# Altium PCB AT89S52多功能板.PcbDoc (part 1 of 5)
Units mm, origin at the board's own origin, x right, y up, seen from the top; angles counter-clockwise.
Board outline 152.4 x 101.6 mm, 2 copper layers (Top Layer, Bottom Layer); 140 components, 143 nets, 570 pads, 50 vias.
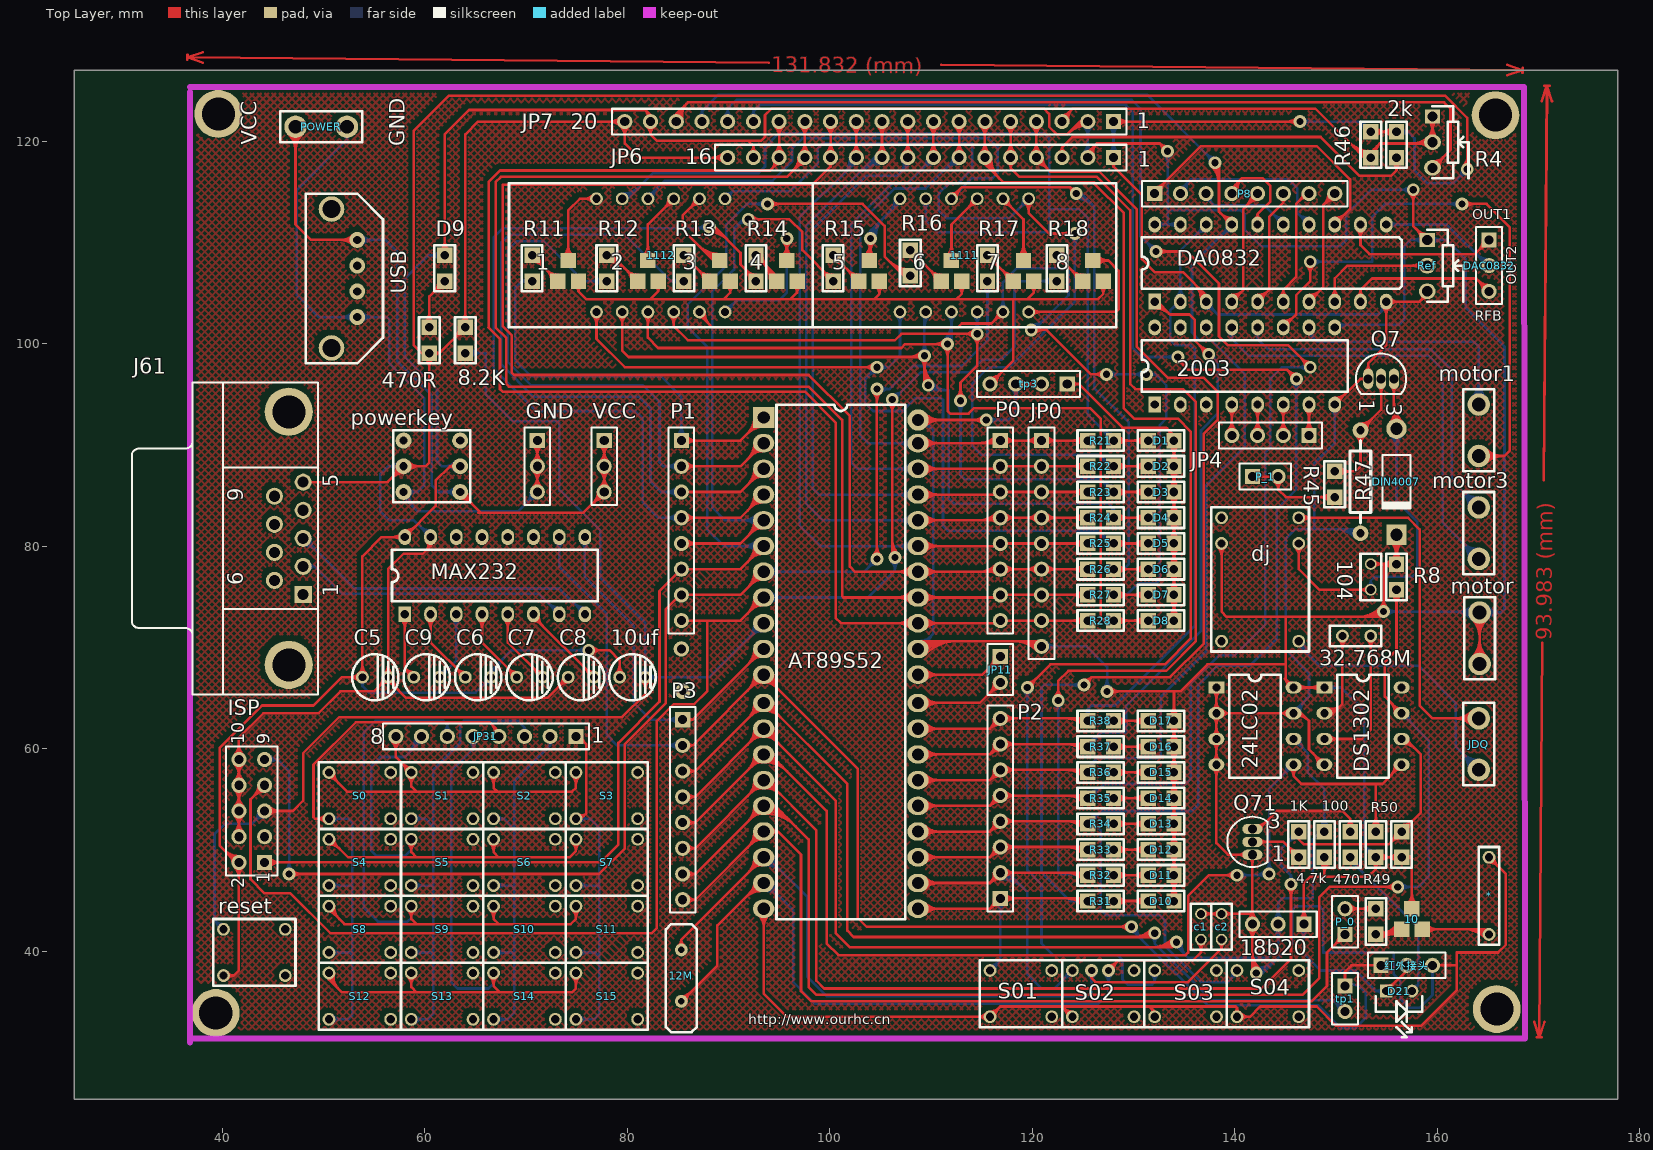
[diagram p0: Top Layer view]
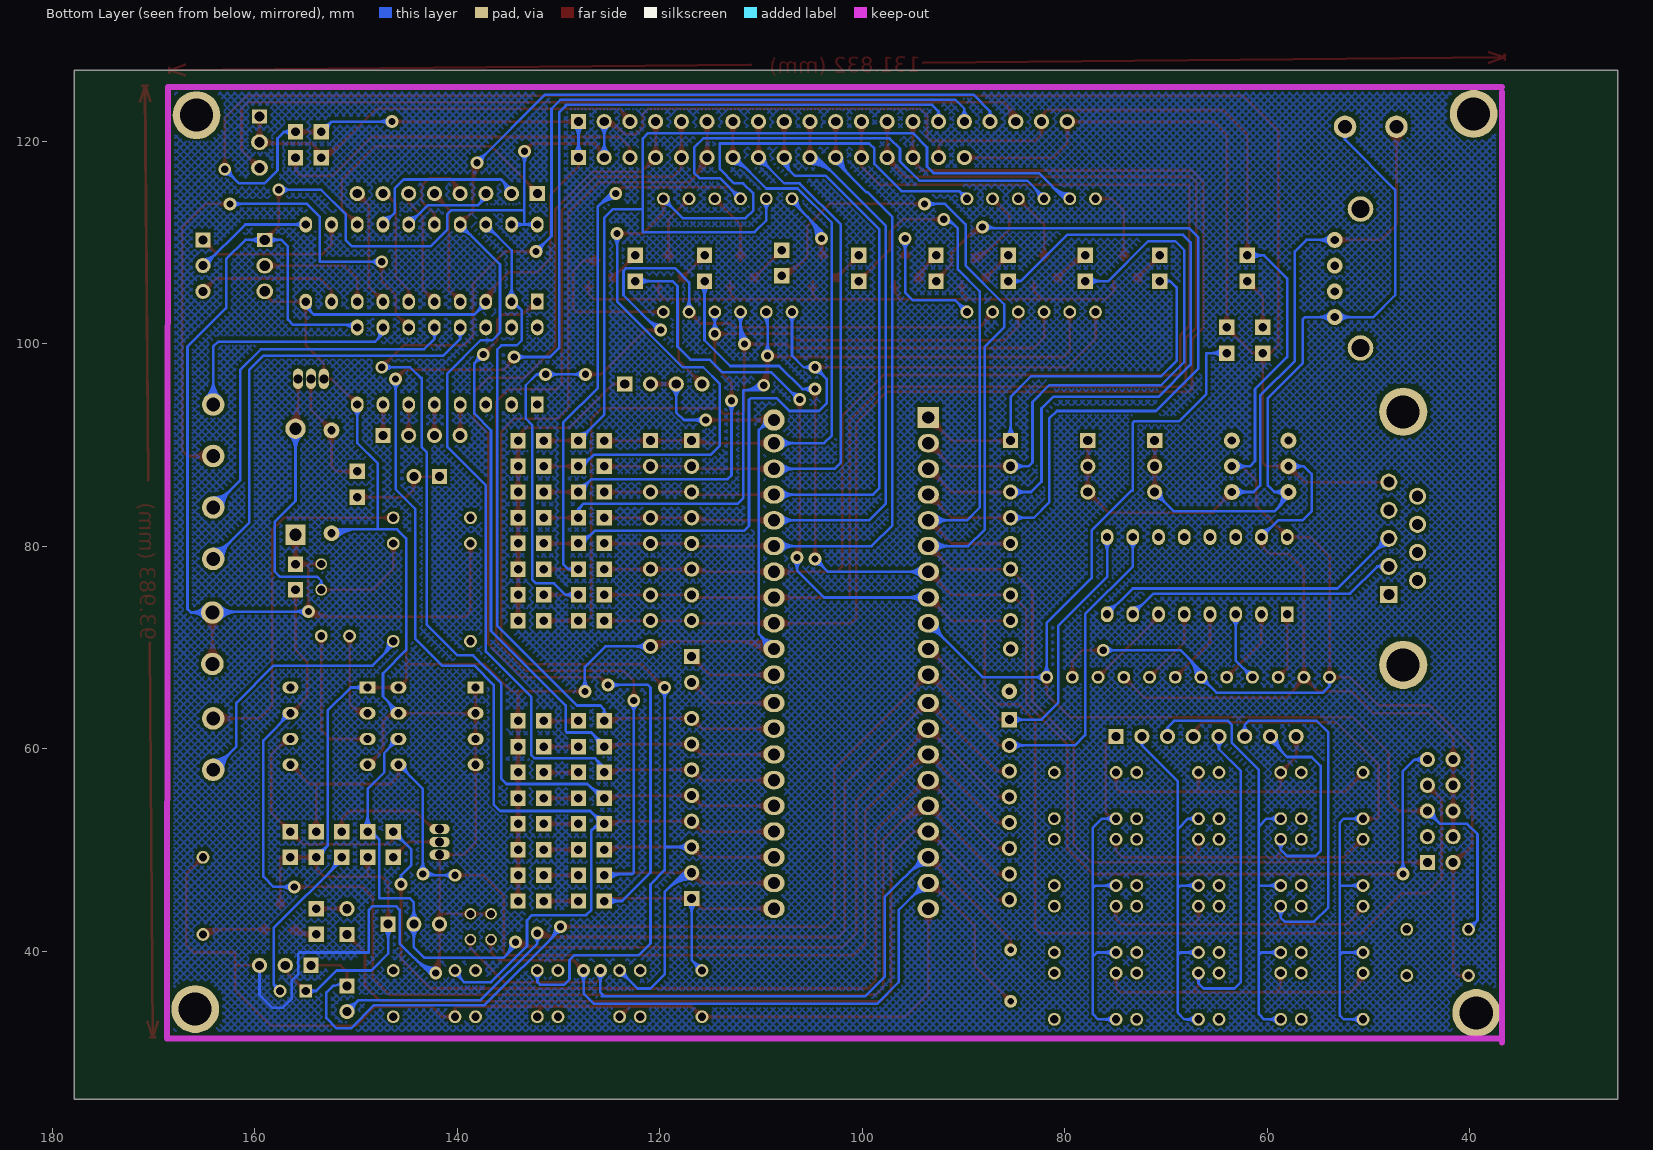
[diagram p1: Bottom Layer view, seen from below]

## Layer stack, top to bottom
Top Layer: signal copper 0.0356
Dielectric: dielectric 0.32, FR-4, Dk 4.8
Bottom Layer: signal copper 0.0356

## Board outline
25.4,25.4 177.8,25.4 177.8,127 25.4,127

## Design rules (kind name [scope] priority, off if disabled: settings)
Clearance [All] p1: gap=0.254
ComponentClearance [All] p1: gap=0.254 collisioncheckmode=0 verticalgap=0.254
PolygonConnect [All] p1: connectstyle=Relief reliefconductorwidth=0.254 reliefentries=4 polygonreliefangle="90 Angle"
RoutingVias [All] p1: holewidth=0.711 width=1.27 viastyle="Through Hole" minholewidth=0.711 minwidth=1.27 maxholewidth=0.711 maxwidth=1.27
SolderMaskExpansion [All] p1: expansion=0.102
TestPointUsage [All] p1: valid=0 allowmultiple=FALSE
Testpoint [All] p1: side=15 testpointundercomponent=TRUE minsize=1.016 maxsize=2.54 preferedsize=1.524 minholesize=0 maxholesize=1.016 preferedholesize=0.813 testpointgrid=0.025 style=1023 order=0123456789
Width [All] p1: maxlimit=0.254 minlimit=0.254 preferedwidth=0.254
17 further rules are at their usual default settings.

## Components (designator, comment, footprint, x,y, rotation, side; value= is the part's Value field where it differs from the comment)
1 "NPN1" NPN1PF 72.136,109.22 r0 top
1K "RES34" RES1PF 146.304,51.816 r270 top
2 "2" NPN1PF 80.01,109.22 r0 top
2k "R5" RES1PF 155.956,120.904 r270 top
3 "3" NPN1PF 87.122,109.22 r0 top
4 "NPN1" NPN1PF 93.726,109.22 r0 top
4.7k "RES1" RES1PF 148.844,49.276 r90 top
5 "NPN1" NPN1PF 101.854,109.22 r0 top
6 "NPN1" NPN1PF 109.982,109.22 r0 top
7 "NPN1" NPN1PF 117.094,109.22 r0 top
8 "NPN1" NPN1PF 123.952,109.22 r0 top
8.2K "RES1" RES1PF 64.008,99.06 r90 top
10 "NPN1" NPN1PF 155.448,45.212 r0 top
10uf "10uf" cap2 74.676,67.056 r0 top
12M "12M" CRYSTAL 84.328,37.592 r90 top
18b20 "CON3" HDR1X3 146.812,42.672 r180 top
24LC02 "24LC02" DIP8 138.176,66.04 r0 top
32.768M "CY" CYPF 155.448,68.58 r180 top (schematic designator 121)
100 "RES2" RES1PF 151.384,49.276 r90 top
104 "0.01UF" RAD0.3 153.416,78.74 r270 top
470 "R2" RES1PF 153.924,41.656 r90 top
470R "R1" RES1PF 60.452,101.6 r270 top
1111 "LED8" LED8PF 98.298,115.824 r0 top
1112 "LED8" LED8PF 68.326,115.824 r0 top
2003 "2003" 2003PF 130.556,94.996 r90 top
* "LS1" LS1PF 165.1,41.656 r90 top
AT89S52 "AT89S52" AT89S52PF 92.456,69.088 r0 top
c1 "C" RAD0.3 136.652,44.196 r270 top
c2 "15p" RAD0.3 138.684,44.196 r270 top
C5 "1uf" cap2 49.276,67.056 r0 top
C6 "1uf" cap2 59.436,67.056 r0 top
C7 "1uf" cap2 64.516,67.056 r0 top
C8 "1uf" cap2 69.596,67.056 r0 top
C9 "1uf" cap2 54.356,67.056 r0 top
D1 "LED" RES1PF 133.985,90.424 r180 top
D2 "LED" RES1PF 133.985,87.884 r180 top
D3 "LED" RES1PF 133.985,85.344 r180 top
D4 "LED" RES1PF 133.985,82.804 r180 top
D5 "LED" RES1PF 133.985,80.264 r180 top
D6 "LED" RES1PF 133.985,77.724 r180 top
D7 "LED" RES1PF 133.985,75.184 r180 top
D8 "LED" RES1PF 133.985,72.644 r180 top
D9 "LED" RES1PF 61.976,108.712 r270 top
D10 "LED" RES1PF 133.985,44.958 r180 top
D11 "LED" RES1PF 133.985,47.498 r180 top
D12 "LED" RES1PF 133.985,50.038 r180 top
D13 "LED" RES1PF 133.985,52.578 r180 top
D14 "LED" RES1PF 133.985,55.118 r180 top
D15 "LED" RES1PF 133.985,57.658 r180 top
D16 "LED" RES1PF 133.985,60.198 r180 top
D17 "LED" RES1PF 133.985,62.738 r180 top
D21 "LED" LED 156.972,35.56 r180 top
DA0832 "DA0832" DAC0832PF 130.556,105.156 r90 top
DAC0832 "CON3" HDR1X3 165.1,110.236 r270 top
DIN4007 "Diode 1N4007" DO-41 155.956,86.36 r270 top
dj "JDQ" JDQPF 138.684,82.804 r0 top
DS1302 "DS1302" DIP8 148.844,66.04 r0 top
GND "公共电源" HDR1X3 71.12,90.424 r270 top
ISP "download" HDR2X5 44.196,48.768 r90 top
J61 "D Connector 9" DSUB1.385-2H9 37.084,80.772 r90 top
JDQ "POWER" POWERPF 164.084,62.992 r270 top
JP0 "Header 9" HDR1X9 120.904,90.424 r270 top
JP4 "Header 4" HDR1X4 147.32,90.932 r180 top
JP6 "Header 16" HDR1X16 128.016,118.364 r180 top
JP7 "" HDR1X20 128.016,121.92 r180 top
JP11 "Header 2" HDR1X2 116.84,69.088 r270 top
JP31 "Header 8" HDR1X8 74.93,61.214 r180 top
MAX232 "MAX232" DIP16 58.039,73.279 r90 top
motor "POWER" POWERPF 164.162,68.366 r90 top
motor1 "POWER" POWERPF 164.084,88.9 r90 top
motor3 "POWER" POWERPF 164.084,78.74 r90 top
P0 "Header 8" HDR1X8 116.84,90.424 r270 top
P1 "Header 8" HDR1X8 85.344,90.424 r270 top locked
P2 "Header 8" HDR1X8 116.84,45.212 r90 top
P3 "Header 8" HDR1X8 85.471,62.865 r270 top
P8 "Header 8" HDR1X8 132.08,114.808 r0 top
P_0 "Header 2" HDR1X2 150.876,41.656 r90 top
P_1 "Header 2" HDR1X2 141.732,86.868 r0 top
POWER "POWER" POWERPF 47.244,121.412 r0 top
powerkey "POWERKEY" POWERKEY1 63.5,85.344 r180 top
Q7 "2N3904" TO-92A 154.432,96.52 r270 top
Q71 "2N3904" TO-92A 141.732,50.8 r0 top
R4 "25k" SIP3-D 159.512,122.428 r270 top
R8 "1K" RES1PF 155.956,75.692 r90 top
R11 "RES1" RES1PF 70.612,106.172 r90 top
R12 "RES1" RES1PF 77.978,106.172 r90 top
R13 "RES1" RES1PF 85.598,106.172 r90 top
R14 "RES1" RES1PF 92.71,106.172 r90 top
R15 "RES1" RES1PF 100.33,106.172 r90 top
R16 "RES1" RES1PF 107.95,106.68 r90 top
R17 "RES1" RES1PF 115.57,106.172 r90 top
R18 "RES1" RES1PF 122.428,106.172 r90 top
R21 "RES1" RES1PF 125.476,90.424 r0 top
R22 "RES1" RES1PF 125.476,87.884 r0 top
R23 "RES1" RES1PF 125.476,85.344 r0 top
R24 "RES1" RES1PF 125.476,82.804 r0 top
R25 "RES1" RES1PF 125.476,80.264 r0 top
R26 "RES1" RES1PF 125.476,77.724 r0 top
R27 "RES1" RES1PF 125.476,75.184 r0 top
R28 "RES1" RES1PF 125.476,72.644 r0 top
R31 "RES1" RES1PF 125.476,44.958 r0 top
R32 "RES1" RES1PF 125.476,47.498 r0 top
R33 "RES1" RES1PF 125.476,50.038 r0 top
R34 "RES1" RES1PF 125.476,52.578 r0 top
R35 "RES1" RES1PF 125.476,55.118 r0 top
R36 "RES1" RES1PF 125.476,57.658 r0 top
R37 "RES1" RES1PF 125.476,60.198 r0 top
R38 "RES1" RES1PF 125.476,62.738 r0 top
R45 "1K" RES1PF 149.86,87.376 r270 top
R46 "RES1" RES1PF 153.416,120.904 r270 top
R47 "220k" AXIAL0.4 152.4,81.28 r90 top
R49 "1K" RES1PF 156.464,51.816 r270 top
R50 "1K" RES1PF 153.924,51.816 r270 top
Ref "25k" SIP3-D 159.004,110.236 r270 top
reset "KEY" keypf 40.132,42.164 r0 top
S0 "KEY" KEYPF 50.546,57.658 r0 top
S01 "KEY" KEYPF 115.824,38.1 r0 top
S1 "KEY" KEYPF 58.674,57.658 r0 top
S02 "KEY" KEYPF 123.952,38.1 r0 top
S2 "KEY" KEYPF 66.802,57.658 r0 top
S03 "KEY" KEYPF 132.08,38.1 r0 top
S3 "KEY" KEYPF 74.93,57.658 r0 top
S04 "KEY" KEYPF 140.208,38.1 r0 top
S4 "KEY" KEYPF 50.546,51.054 r0 top
S5 "KEY" KEYPF 58.674,51.054 r0 top
S6 "KEY" KEYPF 66.802,51.054 r0 top
S7 "KEY" KEYPF 74.93,51.054 r0 top
S8 "KEY" KEYPF 50.546,44.45 r0 top
S9 "KEY" KEYPF 58.674,44.45 r0 top
S10 "KEY" KEYPF 66.802,44.45 r0 top
S11 "KEY" KEYPF 74.93,44.45 r0 top
S12 "KEY" KEYPF 50.546,37.846 r0 top
S13 "KEY" KEYPF 58.674,37.846 r0 top
S14 "KEY" KEYPF 66.802,37.846 r0 top
S15 "KEY" KEYPF 74.93,37.846 r0 top
tp1 "Header 2" HDR1X2 150.876,36.576 r270 top
tp3 "Header 4" HDR1X4 123.444,96.012 r180 top
USB "USBPOWER" USBPOWER1 53.34,102.616 r90 top (schematic designator 211)
VCC "" HDR1X3 77.724,90.424 r270 top
红外接头 "Header 3" HDR1X3 154.432,38.608 r0 top

## Footprints (in the part's own frame and the unit in brackets; to place one, negate y for a bottom-side part, rotate by r counter-clockwise, add the part's x,y. Pads: shape width x height; smd on the part's side, far side on the other; paste and mask are expansions set on the pad)
2003PF [mm] "2003"
  rect 1.575x1.25 hole 0.813: 1(-1.02,-1.525)
  oval 1.575x1.25 hole 0.813: 2(-1.02,-4.065) 3(-1.02,-6.605) 4(-1.02,-9.145) 5(-1.02,-11.685) 6(-1.02,-14.225) 7(-1.02,-16.765) 8(-1.02,-19.305) 9(6.6,-19.305) 10(6.6,-16.765) 11(6.6,-14.225) 12(6.6,-11.685) 13(6.6,-9.145) 14(6.6,-6.605) 15(6.6,-4.065) 16(6.6,-1.525)
  silkscreen extent 0.25,-20.58 5.33,-0.25
AT89S52PF [mil]
  rect 82.87x82.87 hole 47.75: 1(39.85,929.96)
  oval 82.87x71.06 hole 47.75: 2(39.85,829.96) 3(39.85,729.96) 4(39.85,629.96) 5(39.85,529.96) 6(39.85,429.96) 7(39.85,329.96) 8(39.85,229.96) 9(39.85,129.96) 10(39.85,29.96) 11(39.85,-70.04) 12(40,-180) 13(40,-280) 14(40,-380) 15(40,-480) 16(40,-580) 17(40,-680) 18(40,-780) 19(40,-880) 20(40,-980) 21(640,-980) 22(640,-880) 23(640,-780) 24(640,-680) 25(640,-580) 26(640,-480) 27(640,-380) 28(640,-280) 29(640,-180) 30(639.85,-70.04) 31(639.85,29.96) 32(639.85,129.96) 33(639.85,229.96) 34(639.85,329.96) 35(639.85,429.96) 36(639.85,529.96) 37(639.85,629.96) 38(639.85,729.96) 39(639.85,829.96)
  round 82.87 hole 47.75: 40(640,920)
  silkscreen extent 90,-1020 590,980
AXIAL0.4 [mil]
  round 62 hole 32: 1(-0.15,-0.04) 2(399.85,-0.04)
  silkscreen extent 40,-40 360,40
cap2 [mil]
  round 50 hole 30: 1(180,0) 2(280,0)
  silkscreen extent 140,-90 320,90
CRYSTAL [mil]
  round 50 hole 25: 1(-100,-40) 2(100,-40)
  silkscreen extent -220,-100 200,20
CYPF [mil] "CY"
  round 50 hole 30: 1(80,-100) 2(190,-100)
  silkscreen extent 40,-140 240,-60
DAC0832PF [mil] "DAC0832"
  rect 62x49.21 hole 32: 1(-40.15,-60.04)
  oval 62x49.21 hole 32: 2(-40.15,-160.04) 3(-40.15,-260.04) 4(-40.15,-360.04) 5(-40.15,-460.04) 6(-40.15,-560.04) 7(-40.15,-660.04) 8(-40.15,-760.04) 9(-40,-860) 10(-40.15,-960.04) 11(259.85,-960.04) 12(259.85,-860.04) 13(259.85,-760.04) 14(259.85,-660.04) 15(259.85,-560.04) 16(259.85,-460.04) 17(259.85,-360.04) 18(259.85,-260.04) 19(259.85,-160.04) 20(259.85,-60.04)
  silkscreen extent 10,-1020 210,-10
DIP8 [mil]
  rect 62x48 hole 32: 1(-0.15,-0.04)
  oval 62x48 hole 32: 2(-0.15,-100.04) 3(-0.15,-200.04) 4(-0.15,-300.04) 5(299.85,-300.04) 6(299.85,-200.04) 7(299.85,-100.04) 8(299.85,-0.04)
  silkscreen extent 50,-350 250,50
DIP16 [mil]
  rect 62x49.21 hole 32: 1(-0.15,-0.04)
  oval 62x49.21 hole 32: 2(-0.15,-100.04) 3(-0.15,-200.04) 4(-0.15,-300.04) 5(-0.15,-400.04) 6(-0.15,-500.04) 7(-0.15,-600.04) 8(-0.15,-700.04) 9(299.85,-700.04) 10(299.85,-600.04) 11(299.85,-500.04) 12(299.85,-400.04) 13(299.85,-300.04) 14(299.85,-200.04) 15(299.85,-100.04) 16(299.85,-0.04)
  silkscreen extent 50,-750 250,50
DO-41 [mm] "Diode, Axial; Body 5.2 x 2.7 mm (LxDia. max), Lead Dia. 0.86 mm (max)"
  round 2 hole 1.2: 1(-5.23,0)
  rect 2x2 hole 1.2: 2(5.23,0)
  silkscreen extent -2.65,-1.4 2.74,1.4
DSUB1.385-2H9 [mm] "Connector; D Subminiature; 9 Position; Right Angle; Pitch 1.385 mm"
  rect 1.69x1.69 hole 1.09: 1(-5.54,-10.92)
  round 1.69 hole 1.09: 2(-2.77,-10.92) 3(0,-10.92) 4(2.77,-10.92) 5(5.54,-10.92) 6(-4.155,-8.08) 7(-1.385,-8.08) 8(1.385,-8.08) 9(4.155,-8.08)
  round 4.76 hole 3.26: 10(-12.495,-9.5) 11(12.495,-9.5)
  silkscreen extent -15.4,-12.4 15.4,6
HDR1X2 [mm] "Connector; Header; 2 Position"
  rect 1.5x1.5 hole 0.9: 1(0,0)
  round 1.5 hole 0.9: 2(2.54,0)
  silkscreen extent -1.27,-1.27 3.81,1.27
HDR1X3 [mm] "Connector; Header; 3 Position"
  rect 1.5x1.5 hole 0.9: 1(0,0)
  round 1.5 hole 0.9: 2(2.54,0) 3(5.08,0)
  silkscreen extent -1.27,-1.27 6.35,1.27
HDR1X4 [mm] "Connector; Header; 4 Position"
  rect 1.5x1.5 hole 0.9: 1(0,0)
  round 1.5 hole 0.9: 2(2.54,0) 3(5.08,0) 4(7.62,0)
  silkscreen extent -1.27,-1.27 8.89,1.27
HDR1X8 [mm] "Connector; Header; 8 Position"
  rect 1.5x1.5 hole 0.9: 1(0,0)
  round 1.5 hole 0.9: 2(2.54,0) 3(5.08,0) 4(7.62,0) 5(10.16,0) 6(12.7,0) 7(15.24,0) 8(17.78,0)
  silkscreen extent -1.27,-1.27 19.05,1.27
HDR1X9 [mm] "Connector; Header; 9 Position"
  rect 1.5x1.5 hole 0.9: 1(0,0)
  round 1.5 hole 0.9: 2(2.54,0) 3(5.08,0) 4(7.62,0) 5(10.16,0) 6(12.7,0) 7(15.24,0) 8(17.78,0) 9(20.32,0)
  silkscreen extent -1.27,-1.27 21.59,1.27
HDR1X16 [mm] "Connector; Header; 16 Position"
  rect 1.5x1.5 hole 0.9: 1(0,0)
  round 1.5 hole 0.9: 2(2.54,0) 3(5.08,0) 4(7.62,0) 5(10.16,0) 6(12.7,0) 7(15.24,0) 8(17.78,0) 9(20.32,0) 10(22.86,0) 11(25.4,0) 12(27.94,0) 13(30.48,0) 14(33.02,0) 15(35.56,0) 16(38.1,0)
  silkscreen extent -1.27,-1.27 39.37,1.27
HDR1X20 [mm] "Connector; Header; 20 Position"
  rect 1.5x1.5 hole 0.9: 1(0,0)
  round 1.5 hole 0.9: 2(2.54,0) 3(5.08,0) 4(7.62,0) 5(10.16,0) 6(12.7,0) 7(15.24,0) 8(17.78,0) 9(20.32,0) 10(22.86,0) 11(25.4,0) 12(27.94,0) 13(30.48,0) 14(33.02,0) 15(35.56,0) 16(38.1,0) 17(40.64,0) 18(43.18,0) 19(45.72,0) 20(48.26,0)
  silkscreen extent -1.27,-1.27 49.53,1.27
HDR2X5 [mm] "Connector; Header; 5x2 Position"
  rect 1.5x1.5 hole 0.9: 1(0,0)
  round 1.5 hole 0.9: 2(0,2.54) 3(2.54,0) 4(2.54,2.54) 5(5.08,0) 6(5.08,2.54) 7(7.62,0) 8(7.62,2.54) 9(10.16,0) 10(10.16,2.54)
  silkscreen extent -1.27,-1.27 11.43,3.81
JDQPF [mil] "JDQ"
  round 50 hole 32: 1(0,0) 2(300,0) 3(0,-480) 4(300,-480) 5(0,-100) 6(300,-100)
  silkscreen extent -40,-520 340,40
keypf [mil] "KEY"
  round 50 hole 32: 1(0,0) 2(0,-180) ""(240,-180) ""(240,0)
  silkscreen extent -40,-220 280,40
KEYPF [mil] "KEY"
  round 50 hole 32: 1(0,0) 2(0,-180) ""(240,-180) ""(240,0)
  silkscreen extent -40,-220 280,40
LED [mil]
  rect 50x50 hole 32: 1(80,-20)
  round 50 hole 32: 2(-20,-20)
  silkscreen extent -60,0 120,160
LED8PF [mil] "LED8"
  round 50 hole 32: 1(340,-500) 2(440,-500) 3(540,-500) 4(640,-500) 5(740,-500) 6(840,-500) 7(840,-60) 8(740,-60) 9(640,-60) 10(540,-60) 11(440,-60) 12(340,-60)
  silkscreen extent 0,-560 1180,0
LS1PF [mil] "LS1"
  round 50 hole 32: 1(0,0) 2(300,0)
  silkscreen extent -40,-40 340,40
NPN1PF [mil] "NPN1"
  rect 60x60 smd: B(40,-120) C(80,-40) E(120,-120)
POWERKEY1 [mil] "POWERKEY"
  round 62 hole 32: 1(0,0) 2(0,-100) 3(0,-200) 4(220,-200) 5(220,-100) 6(220,0)
  silkscreen extent -40,-240 260,40
POWERPF [mm] "POWER"
  round 2.224 hole 1.362: 1(0,0) 2(5.08,0)
  silkscreen extent -1.52,-1.52 6.6,1.52
RAD0.3 [mil]
  round 45 hole 32: 1(20,0) 2(120,0)
  silkscreen extent -20,-40 160,40
RES1PF [mil] "RES1"
  rect 60x60 hole 33.19: 1(0,0) 2(100,0)
  silkscreen extent -40,-40 140,40
SIP3-D [mil]
  rect 55x60 hole 40: 1(0,0)
  oval 60x65 hole 40: 2(200,0) 3(100,0)
  silkscreen extent -40,0 240,140
TO-92A [mm] "TO, Flat Index; 3 In-Line, Axial Leads; Body Dia. 4.5mm; Leads 0.51 x 0.48 mm (max)"
  oval 2x1 hole 0.9: 1(0,-1.27) 2(0,0) 3(0,1.27)
  silkscreen extent -2.48,-2.48 1.5,2.48
USBPOWER1 [mil] "USBPOWER"
  round 62 hole 32: 1(0,0) 2(100,0) 3(200,0) 4(300,0)
  round 99.37 hole 69.37: ""(-120,100) ""(420,100)
  silkscreen extent -180,-100 480,200

## Part data
1K 2k 100 470 470R R8 R45 R49 R50: library part RES1
2 3: library part NPN1
10uf C5 C6 C7 C8 C9: library part "CAPACITOR POL", "Capacitor"
12M: library part CRYSTAL, "Crystal"
18b20 GND VCC: library part "Header 3", "Header, 3-Pin"
104 c1 c2: library part CAP, "Capacitor"
AT89S52: library part 8051
DAC0832: "Connector"
DIN4007: "1 Amp General Purpose Rectifier"
ISP: library part "Header 5X2", "Header, 5-Pin, Dual row"
J61: "Receptacle Assembly, 9 Position, Right Angle"
JP0: "Header, 9-Pin"
JP4 tp3: "Header, 4-Pin"
JP6: "Header, 16-Pin"
JP7: library part "Header 20", "Header, 20-Pin"
JP11 P_0 P_1 tp1: "Header, 2-Pin"
JP31 P0 P1 P2 P3 P8: "Header, 8-Pin"
Q7 Q71: "NPN General Purpose Amplifier"
R4 Ref: library part POT2, "Potentiometer"
R47: library part RES2
红外接头: "Header, 3-Pin"

## Free pads (board coordinates)
  round 1.524 hole 0.9: 0(85.344,69.85)
  round 1.524 hole 0.762: 1(85.471,65.659)
  round 4.72 hole 3.267: 2(39.37,33.909) 2(39.624,122.682) 2(165.735,122.555) 2(165.862,34.29)

## Via types
v1: diameter 1.27, hole 0.711, Top Layer to Bottom Layer, 50 vias

## Nets (pads, with @x,y where several pads share a name; then routed paths per layer and width w, separated by ;. In a path a pad name is that pad's centre, name@x,y a point inside that pad or via, vN(x,y) a via of type N, cw(c..) or ccw(c..) an arc to the next point about the centre after c; other vN are vias at no path point)
DISPLAY: 1.E 2.E 3.E 4.E 5.E 6.E 7.E 8.E tp3.4 | length 94
  Top Layer w0.254: 1.E@75.184,106.172 75.184,105.156 ; 82.296,104.394 83.058,105.156 ; 2.E@83.058,106.172 83.058,105.156 ; 89.535,104.394 90.17,105.029 ; 3.E@89.835,105.633 cw(c89.459,105.029) 90.17,105.029 ; 3.E@90.17,106.172 90.17,105.029 ; 3.E@90.505,105.633 ccw(c90.881,105.029) 90.17,105.029 ; 96.139,104.394 96.774,105.029 ; 4.E@96.439,105.633 cw(c96.063,105.029) 96.774,105.029 ; 4.E@96.774,106.172 96.774,105.029 ; 4.E@97.109,105.633 ccw(c97.485,105.029) 96.774,105.029 ; 104.394,104.394 104.902,104.902 ; 5.E@104.521,105.664 cw(c103.95,104.902) 104.902,104.902 ; 5.E@104.902,106.172 104.902,104.902 ; 5.E@105.283,105.664 ccw(c105.854,104.902) 104.902,104.902 ; 112.522,104.394 113.03,104.902 ; 6.E@112.649,105.664 cw(c112.078,104.902) 113.03,104.902 ; 6.E@113.03,106.172 113.03,104.902 ; 6.E@113.411,105.664 ccw(c113.982,104.902) 113.03,104.902 ; tp3.4@115.824,96.012 118.11,98.298 118.11,104.394 ; tp3.4@115.824,96.381 ccw(c115.824,97.272) 116.454,96.642 ccw(c117.084,96.012) tp3.4@116.193,96.012 ; tp3.4@115.824,96.635 ccw(c115.824,98.139) 116.888,97.076 ccw(c117.951,96.012) tp3.4@116.447,96.012 ; 119.507,104.394 120.142,105.029 ; 7.E@119.807,105.633 cw(c119.431,105.029) 120.142,105.029 ; 7.E@120.142,106.172 120.142,105.029 ; 7.E@120.477,105.633 ccw(c120.853,105.029) 120.142,105.029 ; 8.E@126.619,105.664 cw(c126.048,104.902) 127,104.902 ; 8.E@127,106.172 127,104.902 ; 8.E@127.381,105.664 ccw(c127.952,104.902) 127,104.902 ; 75.184,105.156 ccw(c74.689,105.156) 74.906,105.601 cw(c74.689,105.156) 75.184,105.156 ; 75.184,105.156 cw(c75.679,105.156) 75.462,105.601 ccw(c75.679,105.156) 75.184,105.156 ; 75.184,105.156 75.946,104.394 126.492,104.394 127,104.902 ; 83.058,105.156 ccw(c82.563,105.156) 82.78,105.601 cw(c82.563,105.156) 83.058,105.156 ; 83.058,105.156 cw(c83.553,105.156) 83.336,105.601 ccw(c83.553,105.156) 83.058,105.156
GND: 2k.1 8.2K.2 18b20.3 24LC02.1 24LC02.2 24LC02.3 24LC02.4 24LC02.7 470R.2 2003.8 *.2 AT89S52.20 c1.1 c2.1 C5.2 C8.1 DA0832.3 DA0832.10 DS1302.4 ISP.4 ISP.6 ISP.8 ISP.10 JP6.1 JP6.16 JP7.1 JP7.20 MAX232.15 powerkey.5 Q7.1 Q71.1 R46.1 R47.1 Ref.2 S01.2 S02.2 S03.2 S04.2 红外接头.3 | length 831.1
  Top Layer w0.254: ISP.4@41.215,51.749 ccw(c40.152,52.812) 41.656,52.812 ccw(c43.16,52.812) ISP.4@42.097,51.749 ; ISP.6@41.215,53.407 cw(c40.152,52.344) 41.656,52.344 cw(c43.16,52.344) ISP.6@42.097,53.407 ; ISP.6@41.215,54.289 ccw(c40.152,55.352) 41.656,55.352 ccw(c43.16,55.352) ISP.6@42.097,54.289 ; ISP.8@41.215,55.947 cw(c40.152,54.884) 41.656,54.884 cw(c43.16,54.884) ISP.8@42.097,55.947 ; ISP.8@41.215,56.829 ccw(c40.152,57.892) 41.656,57.892 ccw(c43.16,57.892) ISP.8@42.097,56.829 ; ISP.10@41.215,58.487 cw(c40.152,57.424) 41.656,57.424 cw(c43.16,57.424) ISP.10@42.097,58.487 ; ISP.10@41.215,59.369 ccw(c40.152,60.432) 41.656,60.432 ccw(c43.16,60.432) ISP.10@42.097,59.369 ; ISP.4@41.395,51.569 ccw(c40.765,52.199) 41.656,52.199 ccw(c42.547,52.199) ISP.4@41.917,51.569 ; ISP.6@41.395,53.587 cw(c40.765,52.957) 41.656,52.957 cw(c42.547,52.957) ISP.6@41.917,53.587 ; ISP.6@41.395,54.109 ccw(c40.765,54.739) 41.656,54.739 ccw(c42.547,54.739) ISP.6@41.917,54.109 ; ISP.8@41.395,56.127 cw(c40.765,55.497) 41.656,55.497 cw(c42.547,55.497) ISP.8@41.917,56.127 ; ISP.8@41.395,56.649 ccw(c40.765,57.279) 41.656,57.279 ccw(c42.547,57.279) ISP.8@41.917,56.649 ; ISP.10@41.395,58.667 cw(c40.765,58.037) 41.656,58.037 cw(c42.547,58.037) ISP.10@41.917,58.667 ; ISP.10@41.395,59.189 ccw(c40.765,59.819) 41.656,59.819 ccw(c42.547,59.819) ISP.10@41.917,59.189 ; ISP.4@41.656,51.308 41.656,61.087 44.069,63.5 49.53,63.5 51.689,65.659 54.991,65.659 C5.2@56.388,67.056 ; 48.004,86.312 56.34,86.312 powerkey.5@57.912,87.884 60.071,87.884 60.452,88.265 470R.2@60.452,99.06 ; C5.2@55.88,67.056 cw(c54.654,67.056) 55.521,66.189 cw(c56.388,65.322) 56.388,66.548 cw(c56.388,65.935) 56.822,66.368 ; C5.2@56.029,67.415 ccw(c55.162,68.282) 56.388,68.282 ccw(c57.614,68.282) C5.2@56.747,67.415 ; C5.2@56.642,67.056 ccw(c57.868,67.056) 57.001,66.189 ; C5.2@56.896,67.056 ccw(c58.736,67.056) 57.435,65.755 ; powerkey.5@57.252,87.884 cw(c55.657,87.884) 56.785,86.757 cw(c57.912,85.629) powerkey.5@57.912,87.224 ; powerkey.5@57.506,87.884 cw(c56.524,87.884) 57.218,87.19 cw(c57.912,86.496) powerkey.5@57.912,87.478 ; powerkey.5@58.199,87.597 cw(c58.893,86.903) 58.893,87.884 cw(c58.893,88.865) powerkey.5@58.199,88.171 ; powerkey.5@58.379,87.417 cw(c59.506,86.29) 59.506,87.884 cw(c59.506,89.478) powerkey.5@58.379,88.351 ; 470R.2@60.003,98.611 cw(c58.919,97.527) 60.452,97.527 cw(c61.985,97.527) 470R.2@60.901,98.611 ; 470R.2@60.183,98.791 cw(c59.532,98.14) 60.452,98.14 cw(c61.372,98.14) 470R.2@60.721,98.791 ; MAX232.15@60.58,80.895 60.58,80.011 ; 8.2K.2@63.373,101.6 cw(c61.84,101.6) 62.924,100.516 cw(c64.008,99.432) 8.2K.2@64.008,100.965 ; 8.2K.2@63.559,102.049 ccw(c62.475,103.133) 64.008,103.133 ccw(c65.541,103.133) 8.2K.2@64.457,102.049 ; 8.2K.2@63.627,101.6 cw(c62.707,101.6) 63.358,100.95 cw(c64.008,100.299) 8.2K.2@64.008,101.219 ; 8.2K.2@63.739,101.869 ccw(c63.088,102.52) 64.008,102.52 ccw(c64.928,102.52) 8.2K.2@64.277,101.869 ; C8.1@73.66,67.056 cw(c72.434,67.056) 73.301,66.189 cw(c74.168,65.322) C8.1@74.168,66.548 ; C8.1@74.168,67.056 72.136,65.024 58.166,65.024 56.388,66.802 56.388,77.724 57.912,79.248 59.817,79.248 60.58,80.011 ; JP7.20@79.315,122.361 cw(c78.252,123.424) 78.252,121.92 cw(c78.252,120.416) 79.315,121.479 cw(c78.252,120.416) 79.756,120.416 cw(c81.26,120.416) JP7.20@80.197,121.479 ; JP7.20@79.495,122.181 cw(c78.865,122.811) 78.865,121.92 cw(c78.865,121.029) 79.495,121.659 cw(c78.865,121.029) 79.756,121.029 cw(c80.647,121.029) JP7.20@80.017,121.659 ; JP6.16@89.475,117.923 ccw(c88.412,116.86) 88.412,118.364 ccw(c88.412,119.868) JP6.16@89.475,118.805 ; JP6.16@89.655,118.103 ccw(c89.025,117.473) 89.025,118.364 ccw(c89.025,119.255) JP6.16@89.655,118.625 ; JP6.16@89.916,118.364 81.153,118.364 79.756,119.761 JP7.20@79.756,121.92 65.278,121.92 64.008,120.65 8.2K.2@64.008,101.6 61.468,99.06 ; AT89S52.20@92.924,43.648 cw(c91.6,42.324) 93.472,42.324 cw(c95.344,42.324) AT89S52.20@94.02,43.648 ; AT89S52.20@93.103,43.827 cw(c92.213,42.937) 93.472,42.937 cw(c94.731,42.937) AT89S52.20@93.841,43.827 ; AT89S52.20@93.472,44.196 93.472,35.814 95.758,33.528 S01.2@115.824,33.528 116.84,34.544 140.081,34.544 140.208,34.417 ; S01.2@115.465,33.169 ccw(c114.598,32.302) 114.598,33.528 ccw(c114.598,34.754) S01.2@115.465,33.887 ; S01.2@115.824,34.036 ccw(c115.824,35.262) 116.691,34.395 ccw(c117.558,33.528) S01.2@116.332,33.528 ; 122.936,34.544 S02.2@123.952,33.528 ; S02.2@123.444,33.528 ccw(c122.218,33.528) 123.085,34.395 ccw(c123.952,35.262) S02.2@123.952,34.036 ; JP6.1@128.016,118.364 128.016,117.475 ; JP7.1@128.016,121.92 v1(146.431,121.92) ; JP7.1@128.277,121.659 cw(c128.907,121.029) 128.907,121.92 cw(c128.907,122.811) JP7.1@128.277,122.181 ; JP7.1@128.457,121.479 cw(c129.52,120.416) 129.52,121.92 cw(c129.52,123.424) JP7.1@128.457,122.361 ; 131.572,34.544 132.08,34.036 S03.2@132.08,33.528 ; 135.975,105.96 cw(c134.313,104.299) DA0832.3@136.663,104.299 ; 136.408,105.527 cw(c135.18,104.299) DA0832.3@136.917,104.299 ; c1.1@136.652,43.688 141.478,43.688 141.732,43.434 ; 136.842,105.093 cw(c136.047,104.299) DA0832.3@137.171,104.299 ; c1.1@136.966,43.374 cw(c137.725,42.615) 137.725,43.688 cw(c137.725,44.761) c1.1@136.966,44.002 ; DA0832.3@137.161,104.136 137.161,104.774 134.874,107.061 132.08,107.061 130.81,108.331 130.81,114.681 128.016,117.475 ; 24LC02.4@137.831,58.078 cw(c137.007,57.254) 138.172,57.254 cw(c139.337,57.254) 24LC02.4@138.513,58.078 ; 24LC02.4@137.831,58.76 ccw(c137.007,59.584) 138.172,59.584 ccw(c139.337,59.584) 24LC02.4@138.513,58.76 ; 24LC02.3@137.831,60.618 cw(c137.007,59.794) 138.172,59.794 cw(c139.337,59.794) 24LC02.3@138.513,60.618 ; 24LC02.3@137.831,61.3 ccw(c137.007,62.124) 138.172,62.124 ccw(c139.337,62.124) 24LC02.3@138.513,61.3 ; 24LC02.2@137.831,63.158 cw(c137.007,62.334) 138.172,62.334 cw(c139.337,62.334) 24LC02.2@138.513,63.158 ; 24LC02.2@137.831,63.84 ccw(c137.007,64.664) 138.172,64.664 ccw(c139.337,64.664) 24LC02.2@138.513,63.84 ; 24LC02.1@137.831,65.698 cw(c137.007,64.874) 138.172,64.874 cw(c139.337,64.874) 24LC02.1@138.513,65.698 ; 24LC02.2@138.172,63.499 146.559,63.499 147.32,62.738 147.32,59.939 DS1302.4@148.84,58.419 ; 24LC02.1@138.172,66.039 138.172,50.677 139.319,49.53 Q71.1@141.732,49.53 141.732,38.227 v1(142.113,37.846) cw(c143.033,38.766) 141.732,38.766 ; c2.1@138.37,43.374 ccw(c137.611,42.615) 137.611,43.688 ccw(c137.611,44.761) c2.1@138.37,44.002 ; 24LC02.2@138.691,63.158 cw(c139.515,62.334) 139.515,63.499 cw(c139.515,64.664) 24LC02.2@138.691,63.84 ; c2.1@138.998,43.374 cw(c139.757,42.615) 139.757,43.688 cw(c139.757,44.761) c2.1@138.998,44.002 ; S04.2@140.567,33.169 cw(c141.434,32.302) 141.434,33.528 cw(c141.434,34.754) S04.2@140.567,33.887 ; Q71.1@140.968,49.266 ccw(c140.331,48.63) 140.331,49.53 ccw(c140.331,50.43) Q71.1@140.968,49.794 ; 18b20.3@141.291,42.231 cw(c140.228,41.168) 141.732,41.168 cw(c143.236,41.168) 18b20.3@142.173,42.231 ; 18b20.3@141.291,43.113 ccw(c140.228,44.176) 141.732,44.176 ccw(c143.236,44.176) 18b20.3@142.173,43.113 ; Q71.1@141.468,49.266 cw(c140.832,48.63) 141.732,48.63 cw(c142.632,48.63) Q71.1@141.996,49.266 ; 18b20.3@141.471,42.411 cw(c140.841,41.781) 141.732,41.781 cw(c142.623,41.781) 18b20.3@141.993,42.411 ; 18b20.3@141.471,42.933 ccw(c140.841,43.563) 141.732,43.563 ccw(c142.623,43.563) 18b20.3@141.993,42.933 ; 141.732,39.379 ccw(c143.646,39.379) v1@142.293,38.026 ; 141.732,39.992 ccw(c144.259,39.992) v1@142.472,38.205 ; 24LC02.7@145.273,63.158 ccw(c144.449,62.334) 144.449,63.499 ccw(c144.449,64.664) 24LC02.7@145.273,63.84 ; 24LC02.7@145.968,63.524 cw(c146.072,62.427) 146.852,63.206 ; 24LC02.7@145.992,63.271 cw(c146.138,61.73) 147.233,62.825 ; v1@146.072,121.561 ccw(c145.205,120.694) 145.205,121.92 ccw(c145.205,123.146) v1@146.072,122.279 ; 147.713,59.546 cw(c146.585,58.419) DS1302.4@148.18,58.419 ; 148.142,59.117 ccw(c148.662,59.637) DS1302.4@148.662,58.902 ; 148.146,59.113 cw(c147.453,58.419) DS1302.4@148.434,58.419 ; 2003.8@149.861,93.976 152.405,96.52 ; 2003.8@149.861,94.383 ccw(c149.861,95.364) 150.555,94.67 ; 2003.8@149.861,94.637 ccw(c149.861,96.231) 150.988,95.104 ; 2003.8@150.359,94.139 cw(c151.169,94.139) 150.596,94.712 ; Q7.1@152.898,97.284 ccw(c152.262,97.921) 153.162,97.921 ccw(c154.062,97.921) Q7.1@153.426,97.284 ; R46.1@153.416,120.904 2k.1@155.956,120.904 ; R46.1@153.685,120.635 cw(c154.336,119.984) 154.336,120.904 cw(c154.336,121.824) R46.1@153.685,121.173 ; R46.1@153.865,120.455 cw(c154.949,119.371) 154.949,120.904 cw(c154.949,122.437) R46.1@153.865,121.353 ; DA0832.10@154.589,103.622 cw(c153.739,102.772) 154.941,102.772 cw(c156.143,102.772) DA0832.10@155.293,103.622 ; DA0832.10@155.293,103.784 cw(c156.143,102.934) 156.143,104.136 cw(c156.143,105.338) DA0832.10@155.293,104.488 ; 2k.1@155.507,120.455 ccw(c154.423,119.371) 154.423,120.904 ccw(c154.423,122.437) 2k.1@155.507,121.353 ; 2k.1@155.687,120.635 ccw(c155.036,119.984) 155.036,120.904 ccw(c155.036,121.824) 2k.1@155.687,121.173 ; 158.408,104.299 ccw(c158.157,104.55) Ref.2@158.438,104.768 ; 158.412,104.302 cw(c158.94,103.773) Ref.2@158.94,104.521 ; Ref.2@159.004,105.156 159.004,104.894 158.246,104.136 DA0832.10@154.941,104.136 154.941,99.823 153.162,98.044 Q7.1@153.162,96.52 152.405,96.52 ; 红外接头.3@159.512,38.608 161.925,38.608 ; 161.925,39.878 161.925,36.195 158.369,32.639 149.987,32.639 148.082,34.544 142.494,34.544 141.478,33.528 S04.2@140.208,33.528 140.208,34.417 ; 162.052,39.878 165.989,39.878 166.751,40.64 166.751,47.625 *.2@165.1,49.276 ; v1@162.582,117.58 ccw(c161.715,118.447) 162.941,118.447 ccw(c164.167,118.447) v1@163.3,117.58 ; v1(162.941,117.221) 162.941,122.301 160.782,124.46 62.357,124.46 58.928,121.031 58.928,99.822 59.69,99.06 61.468,99.06 ; *.2@165.1,48.768 cw(c165.1,47.542) 165.967,48.409 cw(c166.834,49.276) *.2@165.608,49.276 ; 60.58,80.011 ccw(c60.306,80.011) 60.403,80.267 cw(c60.306,80.011) 60.58,80.011 ; 60.58,80.011 cw(c60.854,80.011) 60.757,80.267 ccw(c60.854,80.011) 60.58,80.011 ; 61.468,99.06 ccw(c61.468,98.565) 61.023,98.782 cw(c61.468,98.565) 61.468,99.06 ; 61.468,99.06 cw(c61.468,99.555) 61.023,99.338 ccw(c61.468,99.555) 61.468,99.06 ; 128.016,117.475 ccw(c127.693,117.475) 127.803,117.778 cw(c127.693,117.475) 128.016,117.475 ; 128.016,117.475 cw(c128.339,117.475) 128.229,117.778 ccw(c128.339,117.475) 128.016,117.475 ; S03.2@132.08,33.528 ccw(c131.438,33.727) 131.913,34.203 cw(c131.438,33.727) S03.2@132.08,33.528 ; 140.208,34.417 ccw(c140.732,34.417) 140.466,33.966 cw(c140.732,34.417) 140.208,34.417 ; 140.208,34.417 cw(c139.684,34.417) 139.95,33.966 ccw(c139.684,34.417) 140.208,34.417 ; 152.405,96.52 ccw(c152.405,97.102) 152.866,96.747 cw(c152.405,97.102) 152.405,96.52 ; 152.405,96.52 cw(c152.405,95.938) 152.866,96.293 ccw(c152.405,95.938) 152.405,96.52 ; 60.178,79.609 ccw(c59.765,80.022) 60.205,80.405 cw(c59.765,80.022) 60.178,79.609 ; 60.37,79.801 ccw(c59.971,80.201) 60.396,80.572 cw(c59.971,80.201) 60.37,79.801 ; 60.562,79.993 ccw(c60.176,80.38) 60.588,80.739 cw(c60.176,80.38) 60.562,79.993 ; 131.616,34.5 cw(c130.983,33.868) 131.837,33.603 ccw(c130.983,33.868) 131.616,34.5 ; 141.541,43.625 cw(c141.038,43.121) 141.635,42.734 ccw(c141.038,43.121) 141.541,43.625
  Bottom Layer w0.254: powerkey.5@57.43,87.432 ccw(c56.388,86.456) 56.388,87.884 ; powerkey.5@57.43,88.336 cw(c56.388,89.312) 56.388,87.884 ; powerkey.5@57.615,87.606 ccw(c56.974,87.005) 56.974,87.884 ccw(c56.974,88.763) powerkey.5@57.615,88.162 ; powerkey.5@57.912,87.884 56.388,87.884 ; 59.453,82.023 ccw(c60.58,83.15) MAX232.15@60.58,81.556 ; 59.845,81.631 cw(c59.272,81.058) MAX232.15@60.082,81.058 ; 59.886,81.589 ccw(c60.58,82.283) MAX232.15@60.58,81.302 ; MAX232.15@60.58,80.895 58.925,82.55 56.515,82.55 55.626,83.439 55.626,87.122 56.388,87.884 ; JP6.1@127.575,118.805 ccw(c126.512,119.868) 128.016,119.868 ccw(c129.52,119.868) JP6.1@128.457,118.805 ; JP7.1@127.575,121.479 cw(c126.512,120.416) 128.016,120.416 cw(c129.52,120.416) JP7.1@128.457,121.479 ; JP6.1@127.755,118.625 ccw(c127.125,119.255) 128.016,119.255 ccw(c128.907,119.255) JP6.1@128.277,118.625 ; JP7.1@127.755,121.659 cw(c127.125,121.029) 128.016,121.029 cw(c128.907,121.029) JP7.1@128.277,121.659 ; JP6.1@128.016,118.364 JP7.1@128.016,121.92 ; DA0832.3@137.161,103.476 cw(c137.161,102.181) 138.076,103.097 ; DA0832.3@137.161,103.73 cw(c137.161,103.048) 137.643,103.53 ; DA0832.3@137.161,104.136 137.161,104.012 138.303,102.87 154.178,102.87 154.941,103.633 DA0832.10@154.941,104.136 ; DA0832.3@137.659,103.974 ccw(c138.769,103.974) 137.984,103.189 ; v1@142.113,37.592 ccw(c142.113,38.512) 142.763,37.861 ; v1@142.113,38.1 ccw(c142.113,40.246) 143.631,38.729 ; v1@142.113,38.354 ccw(c142.113,41.113) 144.064,39.162 ; 143.197,38.295 cw(c142.113,39.379) v1(142.113,37.846) 142.748,37.846 145.669,40.767 145.669,44.069 146.05,44.45 148.336,44.45 148.717,44.069 148.717,39.878 155.575,39.878 155.702,39.751 155.702,37.719 156.337,37.084 156.337,35.306 157.226,34.417 158.242,34.417 159.512,35.687 红外接头.3@159.512,38.608 ; 24LC02.7@145.792,63.499 145.792,63.623 147.32,65.151 147.32,67.437 145.034,69.723 145.034,80.772 145.923,81.661 152.016,81.661 R47.1@152.401,81.276 ; 24LC02.7@145.97,63.982 ccw(c145.97,64.418) 146.278,64.109 ; 24LC02.7@146.199,63.499 cw(c147.479,63.499) 146.574,64.405 ; v1(146.431,121.92) 152.4,121.92 ; 24LC02.7@146.453,63.499 cw(c148.347,63.499) 147.007,64.838 ; v1@146.79,121.561 cw(c147.657,120.694) 147.657,121.92 cw(c147.657,123.146) v1@146.79,122.279 ; 147.828,81.661 147.828,88.138 149.861,90.171 2003.8@149.861,93.976 ; 2003.8@149.509,93.462 cw(c148.659,92.612) 149.861,92.612 cw(c151.063,92.612) 2003.8@150.213,93.462 ; 149.878,81.661 cw(c149.878,78.753) R47.1@151.934,80.809 ; 150.491,81.661 cw(c150.491,79.366) R47.1@152.114,80.989 ; 151.104,81.661 cw(c151.104,79.979) R47.1@152.293,81.168 ; R46.1@152.782,120.934 ccw(c151.475,120.995) 152.4,121.92 ; R46.1@153.035,120.922 ccw(c152.252,120.959) 152.806,121.514 ccw(c153.361,122.068) R46.1@153.398,121.285 ; R46.1@153.386,121.538 cw(c153.325,122.845) 152.4,121.92 ; R46.1@153.416,120.904 152.4,121.92 ; 2k.1@155.956,120.904 157.099,120.904 ; 2k.1@156.495,120.569 cw(c157.099,120.193) 157.099,120.904 ; 2k.1@156.495,121.239 ccw(c157.099,121.615) 157.099,120.904 ; v1@162.433,117.221 cw(c161.207,117.221) 162.074,116.354 cw(c162.941,115.487) v1@162.941,116.713 ; v1(162.941,117.221) 161.544,115.824 159.004,115.824 157.734,117.094 157.734,120.269 157.099,120.904 ; 154.348,103.04 ccw(c153.882,103.507) 154.485,103.773 cw(c153.882,103.507) 154.348,103.04 ; 154.611,103.303 ccw(c154.246,103.667) 154.718,103.875 cw(c154.246,103.667) 154.611,103.303 ; 154.673,103.365 cw(c154.941,103.096) 154.941,103.476 ccw(c154.941,103.096) 154.673,103.365
IOUT1: DA0832.12 DAC0832.1 | length 21.3
  Top Layer w0.254: DA0832.12@152.049,111.242 cw(c151.199,110.392) 152.401,110.392 cw(c153.603,110.392) DA0832.12@152.753,111.242 ; DA0832.12@152.401,111.756 152.401,109.727 153.289,108.839 163.703,108.839 DAC0832.1@165.1,110.236 ; DAC0832.1@164.477,110.236 cw(c162.973,110.236) 164.036,109.172 cw(c165.1,108.109) DAC0832.1@165.1,109.613 ; DAC0832.1@164.731,110.236 cw(c163.84,110.236) 164.47,109.606 cw(c165.1,108.976) DAC0832.1@165.1,109.867
IOUT2: DA0832.11 DAC0832.2 | length 16.9
  Bottom Layer w0.254: DA0832.11@154.941,111.756 160.913,111.756 DAC0832.2@164.973,107.696 ; DA0832.11@155.293,111.404 cw(c156.143,110.554) 156.143,111.756 cw(c156.143,112.958) DA0832.11@155.293,112.108 ; 163.82,108.849 ccw(c165.1,110.13) DAC0832.2@165.1,108.319 ; 164.126,108.543 cw(c163.28,107.696) DAC0832.2@164.477,107.696 ; 164.253,108.416 ccw(c165.1,109.262) DAC0832.2@165.1,108.065
LED: D1.1 D2.1 D3.1 D4.1 D5.1 D6.1 D7.1 D8.1 tp3.1 | length 223.8
  Top Layer w0.254: tp3.1@123.444,96.012 124.587,96.012 ; tp3.1@123.968,95.674 cw(c124.587,95.275) 124.587,96.012 ; tp3.1@123.968,96.35 ccw(c124.587,96.749) 124.587,96.012 ; D3.1@133.536,85.793 ccw(c132.452,86.877) 133.985,86.877 ccw(c135.518,86.877) D3.1@134.434,85.793 ; D2.1@133.536,87.435 cw(c132.452,86.351) 133.985,86.351 cw(c135.518,86.351) D2.1@134.434,87.435 ; D2.1@133.536,88.333 ccw(c132.452,89.417) 133.985,89.417 ccw(c135.518,89.417) D2.1@134.434,88.333 ; D1.1@133.536,89.975 cw(c132.452,88.891) 133.985,88.891 cw(c135.518,88.891) D1.1@134.434,89.975 ; D3.1@133.716,85.613 ccw(c133.065,86.264) 133.985,86.264 ccw(c134.905,86.264) D3.1@134.254,85.613 ; D2.1@133.716,87.615 cw(c133.065,86.964) 133.985,86.964 cw(c134.905,86.964) D2.1@134.254,87.615 ; D2.1@133.716,88.153 ccw(c133.065,88.804) 133.985,88.804 ccw(c134.905,88.804) D2.1@134.254,88.153 ; D1.1@133.716,90.155 cw(c133.065,89.504) 133.985,89.504 cw(c134.905,89.504) D1.1@134.254,90.155 ; D7.1@133.985,75.184 D8.1@133.985,72.644 ; D5.1@133.985,80.264 D8.1@133.985,72.644 ; D4.1@133.985,82.804 D8.1@133.985,72.644 ; D3.1@133.985,85.344 D8.1@133.985,72.644 ; 124.587,96.012 128.905,91.694 133.223,91.694 133.985,90.932 D2.1@133.985,87.884 D8.1@133.985,72.644 ; D8.1@133.536,73.093 ccw(c132.452,74.177) 133.985,74.177 ; D8.1@133.536,73.093 ccw(c132.452,74.177) 133.985,74.177 ; D8.1@133.536,73.093 ccw(c132.452,74.177) 133.985,74.177 ; D8.1@133.536,73.093 ccw(c132.452,74.177) 133.985,74.177 ; D8.1@133.536,73.093 ccw(c132.452,74.177) 133.985,74.177 ; D7.1@133.536,74.735 cw(c132.452,73.651) 133.985,73.651 ; D7.1@133.536,74.735 cw(c132.452,73.651) 133.985,73.651 ; D7.1@133.536,74.735 cw(c132.452,73.651) 133.985,73.651 ; D7.1@133.536,74.735 cw(c132.452,73.651) 133.985,73.651 ; D7.1@133.536,74.735 cw(c132.452,73.651) 133.985,73.651 ; D7.1@133.536,75.633 ccw(c132.452,76.717) 133.985,76.717 ; D7.1@133.536,75.633 ccw(c132.452,76.717) 133.985,76.717 ; D7.1@133.536,75.633 ccw(c132.452,76.717) 133.985,76.717 ; D7.1@133.536,75.633 ccw(c132.452,76.717) 133.985,76.717 ; D6.1@133.536,77.275 cw(c132.452,76.191) 133.985,76.191 ; D6.1@133.536,77.275 cw(c132.452,76.191) 133.985,76.191 ; D6.1@133.536,77.275 cw(c132.452,76.191) 133.985,76.191 ; D6.1@133.536,77.275 cw(c132.452,76.191) 133.985,76.191 ; D6.1@133.536,78.173 ccw(c132.452,79.257) 133.985,79.257 ; D6.1@133.536,78.173 ccw(c132.452,79.257) 133.985,79.257 ; D6.1@133.536,78.173 ccw(c132.452,79.257) 133.985,79.257 ; D6.1@133.536,78.173 ccw(c132.452,79.257) 133.985,79.257 ; D5.1@133.536,79.815 cw(c132.452,78.731) 133.985,78.731 ; D5.1@133.536,79.815 cw(c132.452,78.731) 133.985,78.731 ; D5.1@133.536,79.815 cw(c132.452,78.731) 133.985,78.731 ; D5.1@133.536,79.815 cw(c132.452,78.731) 133.985,78.731 ; D5.1@133.536,80.713 ccw(c132.452,81.797) 133.985,81.797 ; D5.1@133.536,80.713 ccw(c132.452,81.797) 133.985,81.797 ; D5.1@133.536,80.713 ccw(c132.452,81.797) 133.985,81.797 ; D4.1@133.536,82.355 cw(c132.452,81.271) 133.985,81.271 ; D4.1@133.536,82.355 cw(c132.452,81.271) 133.985,81.271 ; D4.1@133.536,82.355 cw(c132.452,81.271) 133.985,81.271 ; D8.1@133.716,72.913 ccw(c133.065,73.564) 133.985,73.564 ; D8.1@133.716,72.913 ccw(c133.065,73.564) 133.985,73.564 ; D8.1@133.716,72.913 ccw(c133.065,73.564) 133.985,73.564 ; D8.1@133.716,72.913 ccw(c133.065,73.564) 133.985,73.564 ; D8.1@133.716,72.913 ccw(c133.065,73.564) 133.985,73.564 ; D7.1@133.716,74.915 cw(c133.065,74.264) 133.985,74.264 ; D7.1@133.716,74.915 cw(c133.065,74.264) 133.985,74.264 ; D7.1@133.716,74.915 cw(c133.065,74.264) 133.985,74.264 ; D7.1@133.716,74.915 cw(c133.065,74.264) 133.985,74.264 ; D7.1@133.716,74.915 cw(c133.065,74.264) 133.985,74.264 ; D7.1@133.716,75.453 ccw(c133.065,76.104) 133.985,76.104 ; D7.1@133.716,75.453 ccw(c133.065,76.104) 133.985,76.104 ; D7.1@133.716,75.453 ccw(c133.065,76.104) 133.985,76.104 ; D7.1@133.716,75.453 ccw(c133.065,76.104) 133.985,76.104 ; D6.1@133.716,77.455 cw(c133.065,76.804) 133.985,76.804 ; D6.1@133.716,77.455 cw(c133.065,76.804) 133.985,76.804 ; D6.1@133.716,77.455 cw(c133.065,76.804) 133.985,76.804 ; D6.1@133.716,77.455 cw(c133.065,76.804) 133.985,76.804 ; D6.1@133.716,77.993 ccw(c133.065,78.644) 133.985,78.644 ; D6.1@133.716,77.993 ccw(c133.065,78.644) 133.985,78.644 ; D6.1@133.716,77.993 ccw(c133.065,78.644) 133.985,78.644 ; D6.1@133.716,77.993 ccw(c133.065,78.644) 133.985,78.644 ; D5.1@133.716,79.995 cw(c133.065,79.344) 133.985,79.344 ; D5.1@133.716,79.995 cw(c133.065,79.344) 133.985,79.344 ; D5.1@133.716,79.995 cw(c133.065,79.344) 133.985,79.344 ; D5.1@133.716,79.995 cw(c133.065,79.344) 133.985,79.344 ; D5.1@133.716,80.533 ccw(c133.065,81.184) 133.985,81.184 ; D5.1@133.716,80.533 ccw(c133.065,81.184) 133.985,81.184 ; D5.1@133.716,80.533 ccw(c133.065,81.184) 133.985,81.184 ; D4.1@133.716,82.535 cw(c133.065,81.884) 133.985,81.884 ; D4.1@133.716,82.535 cw(c133.065,81.884) 133.985,81.884 ; D4.1@133.716,82.535 cw(c133.065,81.884) 133.985,81.884 ; 133.985,73.564 ccw(c134.905,73.564) D8.1@134.254,72.913 ; 133.985,73.564 ccw(c134.905,73.564) D8.1@134.254,72.913 ; 133.985,73.564 ccw(c134.905,73.564) D8.1@134.254,72.913 ; 133.985,73.564 ccw(c134.905,73.564) D8.1@134.254,72.913 ; 133.985,73.564 ccw(c134.905,73.564) D8.1@134.254,72.913 ; 133.985,73.651 cw(c135.518,73.651) D7.1@134.434,74.735 ; 133.985,73.651 cw(c135.518,73.651) D7.1@134.434,74.735 ; 133.985,73.651 cw(c135.518,73.651) D7.1@134.434,74.735 ; 133.985,73.651 cw(c135.518,73.651) D7.1@134.434,74.735 ; 133.985,73.651 cw(c135.518,73.651) D7.1@134.434,74.735 ; 133.985,74.177 ccw(c135.518,74.177) D8.1@134.434,73.093 ; 133.985,74.177 ccw(c135.518,74.177) D8.1@134.434,73.093 ; 133.985,74.177 ccw(c135.518,74.177) D8.1@134.434,73.093 ; 133.985,74.177 ccw(c135.518,74.177) D8.1@134.434,73.093 ; 133.985,74.177 ccw(c135.518,74.177) D8.1@134.434,73.093 ; 133.985,74.264 cw(c134.905,74.264) D7.1@134.254,74.915 ; 133.985,74.264 cw(c134.905,74.264) D7.1@134.254,74.915 ; 133.985,74.264 cw(c134.905,74.264) D7.1@134.254,74.915 ; 133.985,74.264 cw(c134.905,74.264) D7.1@134.254,74.915 ; 133.985,74.264 cw(c134.905,74.264) D7.1@134.254,74.915 ; 133.985,76.104 ccw(c134.905,76.104) D7.1@134.254,75.453 ; 133.985,76.104 ccw(c134.905,76.104) D7.1@134.254,75.453 ; 133.985,76.104 ccw(c134.905,76.104) D7.1@134.254,75.453 ; 133.985,76.104 ccw(c134.905,76.104) D7.1@134.254,75.453 ; 133.985,76.191 cw(c135.518,76.191) D6.1@134.434,77.275 ; 133.985,76.191 cw(c135.518,76.191) D6.1@134.434,77.275 ; 133.985,76.191 cw(c135.518,76.191) D6.1@134.434,77.275 ; 133.985,76.191 cw(c135.518,76.191) D6.1@134.434,77.275 ; 133.985,76.717 ccw(c135.518,76.717) D7.1@134.434,75.633 ; 133.985,76.717 ccw(c135.518,76.717) D7.1@134.434,75.633 ; 133.985,76.717 ccw(c135.518,76.717) D7.1@134.434,75.633 ; 133.985,76.717 ccw(c135.518,76.717) D7.1@134.434,75.633 ; 133.985,76.804 cw(c134.905,76.804) D6.1@134.254,77.455 ; 133.985,76.804 cw(c134.905,76.804) D6.1@134.254,77.455 ; 133.985,76.804 cw(c134.905,76.804) D6.1@134.254,77.455 ; 133.985,76.804 cw(c134.905,76.804) D6.1@134.254,77.455 ; 133.985,78.644 ccw(c134.905,78.644) D6.1@134.254,77.993 ; 133.985,78.644 ccw(c134.905,78.644) D6.1@134.254,77.993 ; 133.985,78.644 ccw(c134.905,78.644) D6.1@134.254,77.993 ; 133.985,78.644 ccw(c134.905,78.644) D6.1@134.254,77.993 ; 133.985,78.731 cw(c135.518,78.731) D5.1@134.434,79.815 ; 133.985,78.731 cw(c135.518,78.731) D5.1@134.434,79.815 ; 133.985,78.731 cw(c135.518,78.731) D5.1@134.434,79.815 ; 133.985,78.731 cw(c135.518,78.731) D5.1@134.434,79.815 ; 133.985,79.257 ccw(c135.518,79.257) D6.1@134.434,78.173 ; 133.985,79.257 ccw(c135.518,79.257) D6.1@134.434,78.173 ; 133.985,79.257 ccw(c135.518,79.257) D6.1@134.434,78.173 ; 133.985,79.257 ccw(c135.518,79.257) D6.1@134.434,78.173 ; 133.985,79.344 cw(c134.905,79.344) D5.1@134.254,79.995 ; 133.985,79.344 cw(c134.905,79.344) D5.1@134.254,79.995 ; 133.985,79.344 cw(c134.905,79.344) D5.1@134.254,79.995 ; 133.985,79.344 cw(c134.905,79.344) D5.1@134.254,79.995 ; 133.985,81.184 ccw(c134.905,81.184) D5.1@134.254,80.533 ; 133.985,81.184 ccw(c134.905,81.184) D5.1@134.254,80.533 ; 133.985,81.184 ccw(c134.905,81.184) D5.1@134.254,80.533 ; 133.985,81.271 cw(c135.518,81.271) D4.1@134.434,82.355 ; 133.985,81.271 cw(c135.518,81.271) D4.1@134.434,82.355 ; 133.985,81.271 cw(c135.518,81.271) D4.1@134.434,82.355 ; 133.985,81.797 ccw(c135.518,81.797) D5.1@134.434,80.713 ; 133.985,81.797 ccw(c135.518,81.797) D5.1@134.434,80.713 ; 133.985,81.797 ccw(c135.518,81.797) D5.1@134.434,80.713 ; 133.985,81.884 cw(c134.905,81.884) D4.1@134.254,82.535 ; 133.985,81.884 cw(c134.905,81.884) D4.1@134.254,82.535 ; 133.985,81.884 cw(c134.905,81.884) D4.1@134.254,82.535 ; 133.985,83.724 ccw(c134.905,83.724) 134.254,83.073 cw(c134.905,83.724) 133.985,83.724 ; 133.985,83.724 cw(c133.065,83.724) 133.716,83.073 ccw(c133.065,83.724) 133.985,83.724 ; 133.985,83.811 ccw(c132.452,83.811) 133.536,84.895 cw(c132.452,83.811) 133.985,83.811 ; 133.985,83.811 cw(c135.518,83.811) 134.434,84.895 ccw(c135.518,83.811) 133.985,83.811 ; 133.985,84.337 ccw(c135.518,84.337) 134.434,83.253 cw(c135.518,84.337) 133.985,84.337 ; 133.985,84.337 cw(c132.452,84.337) 133.536,83.253 ccw(c132.452,84.337) 133.985,84.337 ; 133.985,84.424 ccw(c133.065,84.424) 133.716,85.075 cw(c133.065,84.424) 133.985,84.424 ; 133.985,84.424 cw(c134.905,84.424) 134.254,85.075 ccw(c134.905,84.424) 133.985,84.424 ; 133.294,91.623 cw(c132.447,90.777) 133.614,90.509 ccw(c132.447,90.777) 133.294,91.623 ; 133.618,91.299 cw(c132.975,90.656) 133.861,90.452 ccw(c132.975,90.656) 133.618,91.299